# EAGLE board Schematic_grupo6 (EAGLE 9.6.2)
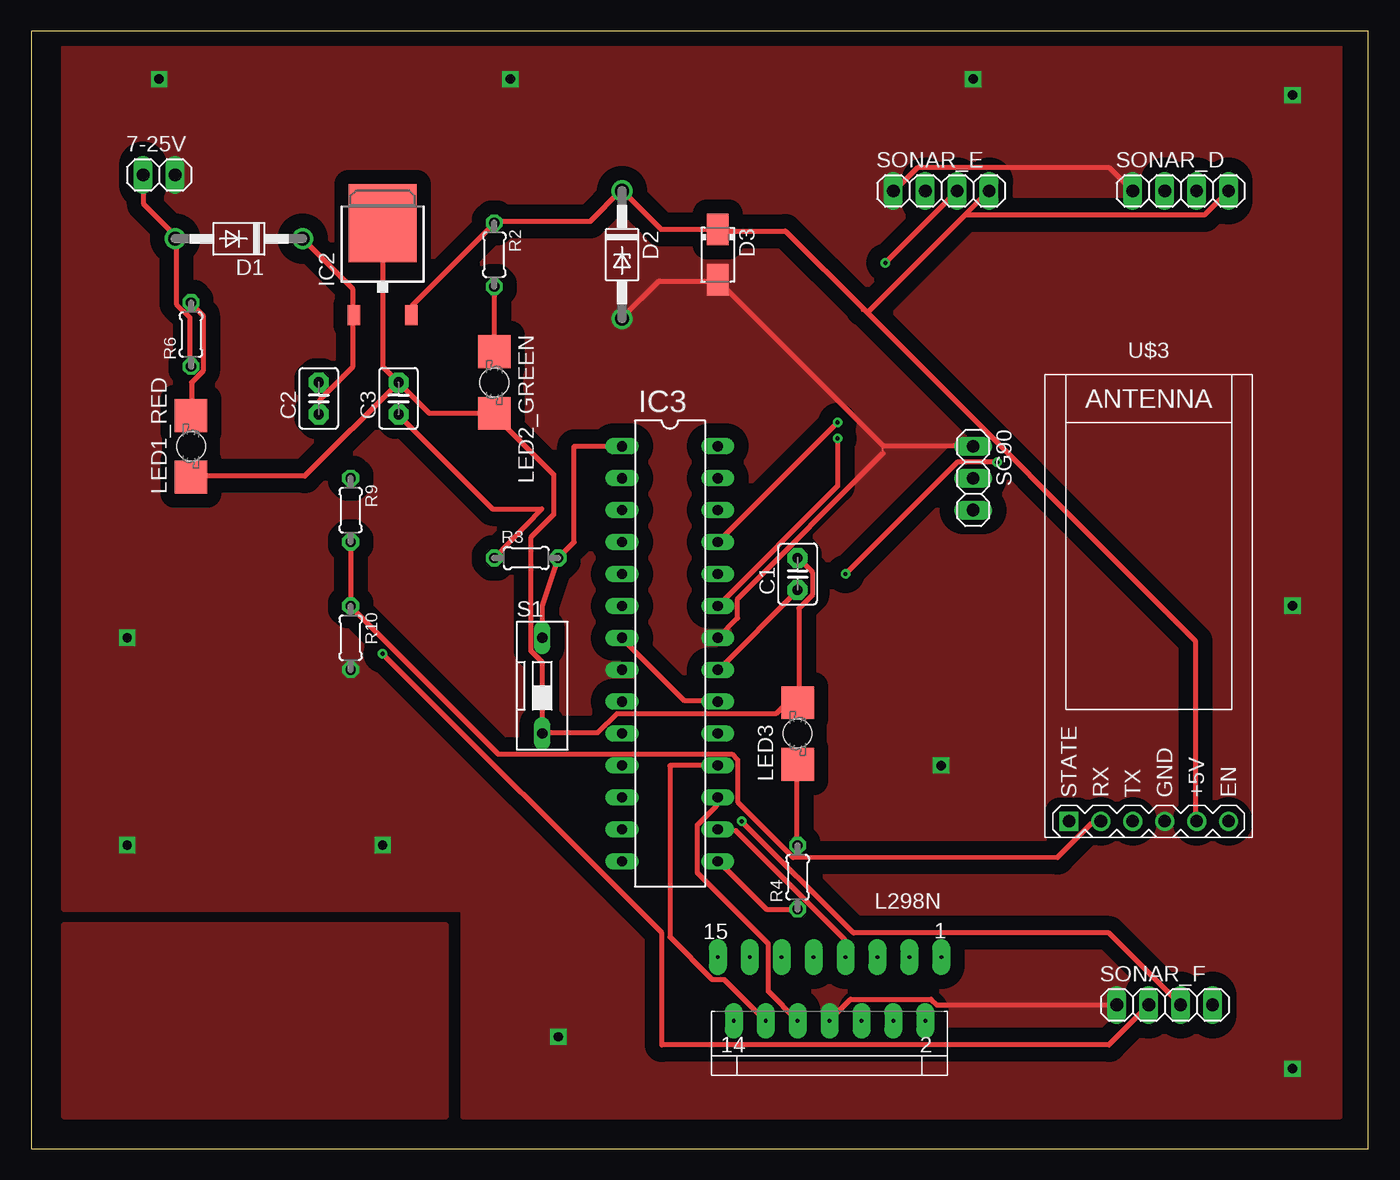
[diagram p0: board, top side]
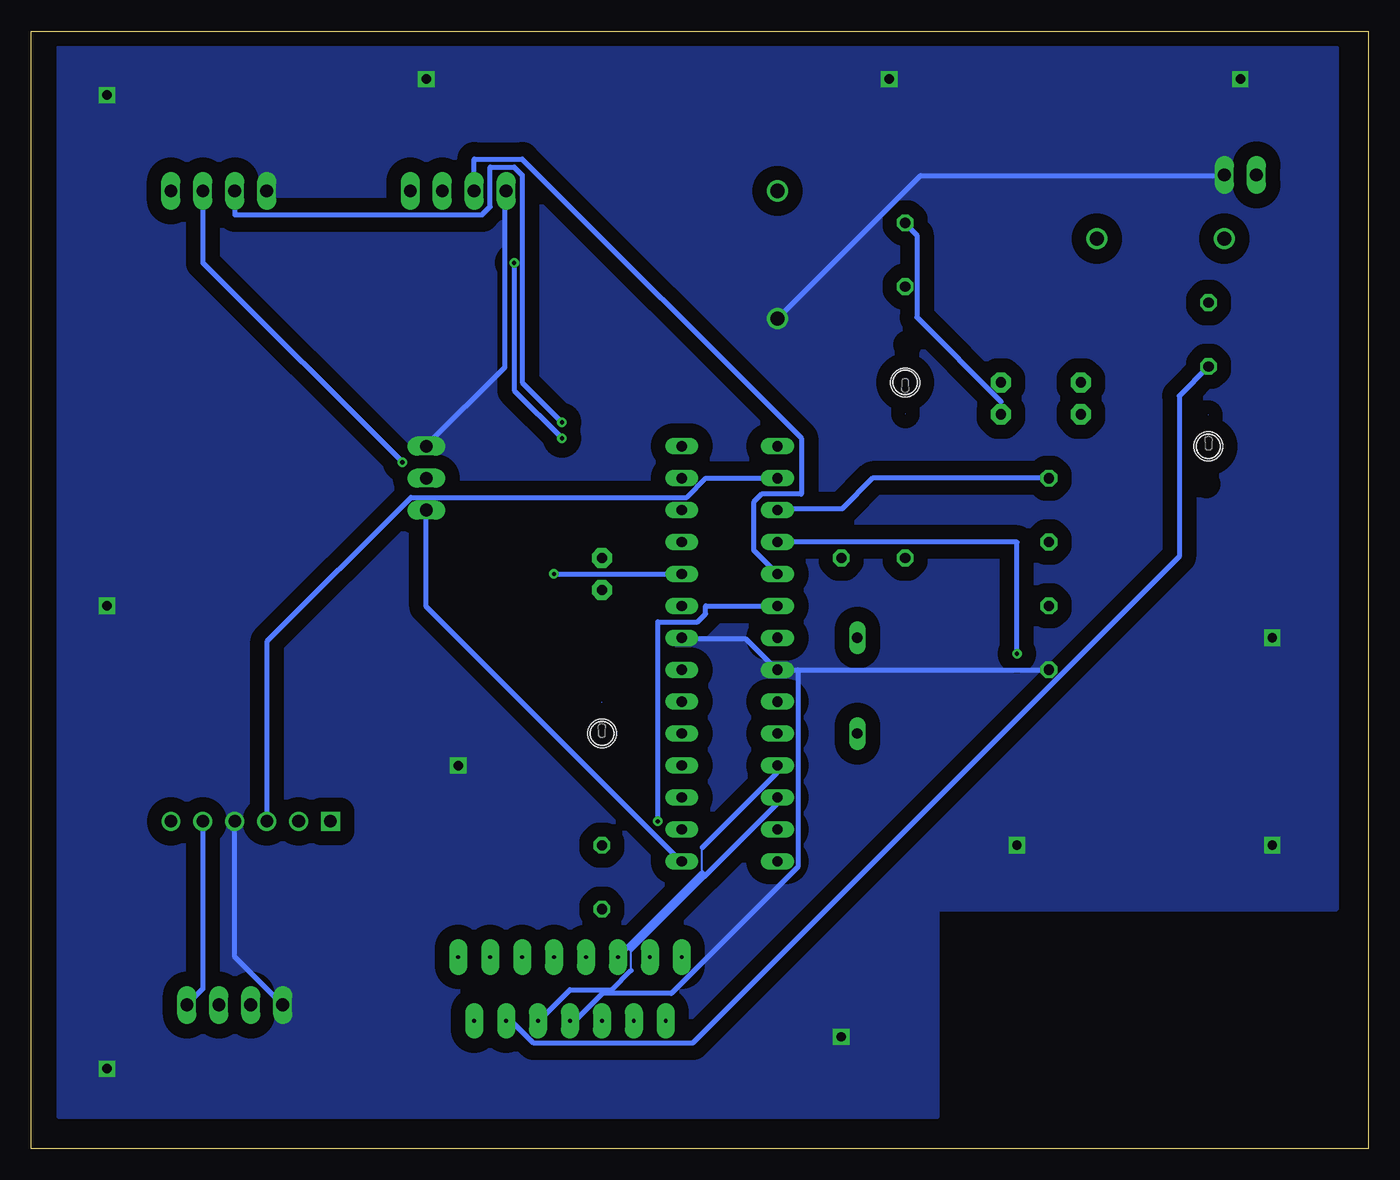
[diagram p1: board, bottom side, seen from below]

Size 106.35 x 88.89 mm. Coordinates in mm from the lower left corner, seen from the top.
Outline: 0,0 106.35,0 106.35,88.89 0,88.89 0,0
Copper layers (1*16): Top 0.035mm / dielectric 1.5mm / Bottom 0.035mm
Design rules "default": minimum track width 6mil, minimum drill 0.35mm, track to track 6mil, track to pad 6mil, pad to pad 6mil, via to via 6mil, smd to smd 6mil, copper to edge 40mil, drill to drill 6mil, minimum pad ring 10mil, minimum via ring 8mil, stop-mask expansion 4mil, vias tented up to drill 0mil, thermal gap 10mil

## Footprints (pad centres in the part's own frame; a part is rotated, then mirrored left to right if it is on the bottom)
1X02 = drill 1.016 long: 1 -1.27,0; 2 1.27,0
C2.5-3 = drill 0.813 pad 1.6 octagon: 1 -1.27,0; 2 1.27,0
DO41-10 = drill 1.118: A 5.08,0; C -5.08,0
DO41Z10 = drill 1.118: A 5.08,0; C -5.08,0
DO214AC = smd 2.5 x 1.7: A 2,0; C -2,0
TO252 = smd 1 x 1.6: 1 -2.28,-4.8; 2 2.28,-4.8 | smd 5.4 x 6.2: 3 0,2.5
DIL28-3 = drill 0.813 long: 1 -16.51,-3.81; 2 -13.97,-3.81; 3 -11.43,-3.81; 4 -8.89,-3.81; 5 -6.35,-3.81; 6 -3.81,-3.81; 7 -1.27,-3.81; 8 1.27,-3.81; 9 3.81,-3.81; 10 6.35,-3.81; 11 8.89,-3.81; 12 11.43,-3.81; 13 13.97,-3.81; 14 16.51,-3.81; 15 16.51,3.81; 16 13.97,3.81; 17 11.43,3.81; 18 8.89,3.81; 19 6.35,3.81; 20 3.81,3.81; 21 1.27,3.81; 22 -1.27,3.81; 23 -3.81,3.81; 24 -6.35,3.81; 25 -8.89,3.81; 26 -11.43,3.81; 27 -13.97,3.81; 28 -16.51,3.81
MW-15 = drill 0.305 pad 1.422 long: 1 -8.89,-7.62; 2 -7.62,-2.54; 3 -6.35,-7.62; 4 -5.08,-2.54; 5 -3.81,-7.62; 6 -2.54,-2.54; 7 -1.27,-7.62; 8 0,-2.54; 9 1.27,-7.62; 10 2.54,-2.54; 11 3.81,-7.62; 12 5.08,-2.54; 13 6.35,-7.62; 14 7.62,-2.54; 15 8.89,-7.62
P47F-BOTTOM = smd 2.6 x 2.6: A -2.45,0; C 2.45,0 | hole 2.3: 0,0
0204/5 = drill 0.813 octagon: 1 -2.54,0; 2 2.54,0
DS-01 = drill 0.813 long: 1 0,-3.81; 2 0,3.81
1X03 = drill 1.016 long: 1 -2.54,0; 2 0,0; 3 2.54,0
1X04 = drill 1.016 long: 1 -3.81,0; 2 -1.27,0; 3 1.27,0; 4 3.81,0
WIRELESS-BLUETOOTH-HC-05 = drill 1 square: 1 -6.35,-17.145 | drill 1: 2 -3.81,-17.145; 3 -1.27,-17.145; 4 1.27,-17.145; 5 3.81,-17.145; 6 6.35,-17.145

## Placement (x,y rotation side)
7-25V  [1X02]  10.16,77.47 0 top
C1  22pF  [C2.5-3]  60.96,45.72 90 top
C2  330nF  [C2.5-3]  22.86,59.69 90 top
C3  100nF  [C2.5-3]  29.21,59.69 90 top
D1  1N4007  [DO41-10]  16.51,72.39 180 top
D2  1N4728  [DO41Z10]  46.99,71.12 270 top
D3  SMAJ5.0A  [DO214AC]  54.61,71.12 270 top
IC2  LM 7805  [TO252]  27.94,71.12 0 top
IC3  ATMEGA328P  [DIL28-3]  50.8,39.37 270 top
L298N  [MW-15]  63.5,7.62 180 top
LED1_RED  LAP4-BOTTOM  [P47F-BOTTOM]  12.7,55.88 90 top
LED2_GREEN  LAP4-BOTTOM  [P47F-BOTTOM]  36.83,60.96 270 top
LED3  LAP4-BOTTOM  [P47F-BOTTOM]  60.96,33.02 90 top
R2  300  [0204/5]  36.83,71.12 270 top
R3  10k  [0204/5]  39.37,46.99 0 top
R4  300  [0204/5]  60.96,21.59 90 top
R6  2.2k  [0204/5]  12.7,64.77 90 top
R9  1k  [0204/5]  25.4,50.8 270 top
R10  2k  [0204/5]  25.4,40.64 270 top
S1  [DS-01]  40.64,36.83 0 top
SG90  [1X03]  74.93,53.34 270 top
SONAR_D  [1X04]  91.44,76.2 0 top
SONAR_E  [1X04]  72.39,76.2 0 top
SONAR_F  [1X04]  90.17,11.43 0 top
U$3  WIRELESS-BLUETOOTH-HC-05  [WIRELESS-BLUETOOTH-HC-05]  88.9,43.18 0 top

## Library data of the parts
7-25V SONAR_D SONAR_E SONAR_F = pinhead
C1-C3 = capacitor-wima
D1 D2 = diode
D3 = smaj_10; MF: Littelfuse; MPN: SMAJ5.0A; OC_FARNELL: 1827607; OC_NEWARK: 71J2029
IC2 = linear
IC3 = atmel; OC_FARNELL: unknown; OC_NEWARK: unknown
L298N = stepper_drivers_etc
LED1_RED LED2_GREEN LED3 = led
R2-R4 R6 R9 R10 = rcl; SPICEPREFIX: R
S1 = switch-dil; OC_FARNELL: unknown; OC_NEWARK: unknown
SG90 = pinhead; SPICEPREFIX: J
U$3 = diy-modules

## Nets
0: C1.2 C3.2 IC2.3 LED1_RED.A LED2_GREEN.C LED3.C S1.1
7-25V: 7-25V.1 D1.A L298N.4 R6.1
.: C3.1 D2.C D3.C IC2.2 R2.1 R3.1 SONAR_D.4 SONAR_E.4 SONAR_F.4 U$3.5
AREF: C1.1 IC3.21
AVCC: IC3.7 IC3.20
GND: 7-25V.2 D2.A D3.A IC3.8 IC3.22 L298N.8 R10.2 SG90.1 SONAR_D.1 SONAR_E.1 SONAR_F.1 U$3.4
N$1: LED3.A R4.2
N$3: LED1_RED.C R6.2
N$4: C2.1 D1.C IC2.1
N$5: LED2_GREEN.A R2.2
N$6: C2.2
PB0: IC3.14
PB1: IC3.15 R4.1 SG90.3
PB2: IC3.16 L298N.7
PB3: IC3.17 L298N.10
PB5: L298N.5
PB6: IC3.9
PB7: IC3.10
PC0: IC3.23 SONAR_E.3
PC1: IC3.24 SONAR_D.3
PC2: IC3.25 SONAR_D.2
PC3: IC3.26
PC4: IC3.27
PC5: IC3.28
PD0: IC3.2 U$3.3
PD1: IC3.3 R9.1
PD1': R9.2 R10.1 U$3.2
PD2: IC3.4 SONAR_F.2
PD3: IC3.5 SONAR_E.2
PD4: IC3.6 SONAR_F.3
PD5: IC3.11 L298N.11
PD6: IC3.12 L298N.6
PD7: IC3.13
RESET: IC3.1 R3.2 S1.2
S$1: IC3.18 L298N.12
VSS: L298N.9

## Tracks (layer width: path | path; a pad name or v marks a point on that pad's centre or on a via)
0
  Top 0.152: 61.06,35.51 LED3.C 60.91,35.36 60,35.36 | 61.06,46.94 C1.2 | 12.75,53.49 LED1_RED.A | 36.83,58.52 LED2_GREEN.C 36.83,58.37 | 27.99,73.61 IC2.3 | 40.64,33.07 S1.1
  Top 0.406: 61.06,35.51 61.06,42.98 62.13,44.04 62.13,45.87 61.06,46.94 | 60,35.36 59.23,34.59 46.58,34.59 45.06,33.07 40.64,33.07 40.64,38.71 39.73,39.62 39.73,48.62 41.55,50.44 41.55,53.65 36.83,58.37 | 12.75,53.49 21.74,53.49 C3.2 | 36.83,58.52 31.65,58.52 C3.2 | 27.99,73.61 27.99,62.18 C3.2
7-25V
  Top 0.152: 12.6,62.33 R6.1 | 11.53,72.39 D1.A 11.53,72.54 | 8.94,77.42 7-25V.1
  Top 0.406: 12.6,62.33 12.6,66.14 11.53,67.21 11.53,72.39 | 8.94,77.42 8.94,75.13 11.53,72.54
  Bottom 0.152: 68.07,10.06 68.53,10.06 L298N.4
  Bottom 0.406: 68.07,10.06 66.4,8.38 53.75,8.38 15.04,47.09 15.04,59.89 R6.1
.
  Top 0.152: 29.21,58.37 C3.1 | 30.28,67.06 30.28,66.45 IC2.2 | 36.83,73.61 R2.1 36.83,73.76 | 54.51,73.15 D3.C 54.66,73 | 47.04,76.2 D2.C 46.89,76.2 | 92.61,26.11 U$3.5 | 66.67,66.67 66.04,66.67 66.18,66.81
  Top 0.406: 29.21,58.37 36.68,50.9 40.59,50.9 R3.1 | 36.83,73.61 30.28,67.06 | 54.51,73.15 50.09,73.15 47.04,76.2 | 92.61,26.11 92.61,40.39 66.18,66.81 60,73 54.66,73 | 36.83,73.76 44.45,73.76 46.89,76.2 | 66.67,66.67 74.29,74.3 | 74.29,74.3 SONAR_E.4 | SONAR_D.4 93.34,74.3 74.29,74.3
  Bottom 0.152: 29.21,59.44 C3.1 | 36.83,73.61 R2.1
  Bottom 0.406: 29.21,59.44 35.92,66.14 35.92,72.69 36.83,73.61 | SONAR_F.4 92.71,12.7 U$3.5
AREF
  Top 0.152: 54.66,38.1 IC3.21 | 60.91,44.35 C1.1
  Top 0.406: 60.91,44.35 54.66,38.1
AVCC
  Top 0.152: 54.51,35.66 IC3.20 | 47.04,40.54 IC3.7
  Top 0.406: 54.51,35.66 51.92,35.66 47.04,40.54
GND  (via drill 0.75 pad 1.3)
  Top 0.152: 54.51,69.04 D3.A 54.66,69.04 | 47.04,66.14 D2.A | 74.93,55.93 SG90.1 | 67.77,55.32 67.77,55.93 | 68.68,76.2 SONAR_E.1 | 87.58,76.2 SONAR_D.1 | 63.5,10.21 L298N.8
  Top 0.406: 54.51,69.04 49.94,69.04 47.04,66.14 | 74.93,55.93 67.77,55.93 54.66,69.04 | 67.77,55.32 56.19,43.74 56.19,42.22 IC3.22 | 68.68,76.2 70.51,78.03 85.75,78.03 87.58,76.2 | SONAR_F.1 72.03,11.43 71.58,11.89 65.18,11.89 63.5,10.21
  Bottom 0.152: 54.51,40.54 IC3.22 | 47.04,38.1 IC3.8 | 63.04,10.21 63.5,10.21 L298N.8 | 11.53,77.42 7-25V.2 | 68.68,76.2 SONAR_E.1 | 74.93,55.93 SG90.1
  Bottom 0.406: IC3.8 45.36,38.1 | 45.36,38.1 R10.2 | 54.51,40.54 49.48,40.54 47.04,38.1 | 63.04,10.21 60.91,12.34 55.42,12.34 45.36,22.4 45.36,38.1 | 11.53,77.42 35.61,77.42 D2.A | U$3.4 90.17,15.24 SONAR_F.1 | 68.68,76.2 68.68,62.18 74.93,55.93
  other vias: 7.62,40.64 7.62,24.13 27.94,24.13 41.91,8.89 100.33,6.35 72.39,30.48 100.33,43.18 100.33,83.82 74.93,85.09 10.16,85.09 38.1,85.09
  pour Bottom (isolate 1.143, no thermals): 2.54,87.63 2.54,19.05 34.29,19.05 34.29,2.54 104.14,2.54 104.14,87.63
  pour Top (isolate 1.143, no thermals): 2.54,87.63 2.54,19.05 34.29,19.05 34.29,2.54 104.14,2.54 104.14,87.63
N$1
  Top 0.152: 60.91,30.48 LED3.A | 60.91,24.23 R4.2
  Top 0.406: 60.91,24.23 60.91,30.48
N$3
  Top 0.152: 12.75,58.37 LED1_RED.C | 12.75,67.21 R6.2
  Top 0.406: 12.75,58.37 12.75,60.96 13.66,61.87 13.66,66.29 12.75,67.21
N$4
  Top 0.152: 25.55,66.45 IC2.1 25.55,66.29 | 22.96,59.59 22.96,58.52 C2.1
  Top 0.406: 25.55,66.45 25.55,68.43 D1.C | 22.96,59.59 25.55,62.18 25.55,66.29
N$5
  Top 0.406: R2.2 LED2_GREEN.A
NAME
  pour Top: 2.54,17.78 2.54,2.54 33.02,2.54 33.02,17.78
PB1
  Top 0.152: 54.66,22.86 IC3.15
  Top 0.406: R4.1 58.47,19.05 54.66,22.86
  Bottom 0.152: 54.66,22.86 IC3.15
  Bottom 0.406: SG90.3 74.93,43.13 54.66,22.86
PB2
  Top 0.152: 56.03,25.3 54.66,25.3 IC3.16 | 64.72,16.61 64.72,15.24 L298N.7
  Top 0.406: 64.72,16.61 56.03,25.3
PB3
  Top 0.152: 54.51,27.28 54.51,27.89 IC3.17
  Top 0.406: 54.51,27.28 52.98,25.76 52.98,21.95 58.62,16.31 58.62,12.5 L298N.10
PC0  (via drill 0.35)
  Top 0.406: IC3.23 64.13,52.7 v64.13,56.52 | SONAR_E.3 v67.94,70.48
  Bottom 0.406: v64.13,56.52 67.94,60.33 v67.94,70.48
PC1  (via drill 0.35)
  Top 0.406: v64.77,45.72 73.66,54.61 v76.83,54.61
  Bottom 0.406: v64.77,45.72 IC3.24 | v76.83,54.61 92.71,70.48 SONAR_D.3
PC2  (via drill 0.35)
  Top 0.406: v64.13,57.78 IC3.25
  Bottom 0.406: v64.13,57.78 67.31,60.96 67.31,77.47 67.94,78.11 69.85,78.11 69.85,74.93 70.48,74.3 90.17,74.3 SONAR_D.2
PD0
  Bottom 0.152: 87.58,26.06 U$3.3
  Bottom 0.406: IC3.2 52.68,53.34 54.2,51.82 76.15,51.82 87.58,40.39 87.58,26.06
PD1
  Bottom 0.406: R9.1 39.42,53.34 41.86,50.9 46.89,50.9 IC3.3
PD1'
  Top 0.152: 84.38,25.91 84.99,25.91 | 25.4,43.13 R10.1
  Top 0.356: 60.6,23.16 81.64,23.16
  Top 0.406: R9.2 R10.1 | 81.64,23.16 84.38,25.91 | 60.6,23.16 56.19,27.58 56.19,30.94 55.73,31.39 37.13,31.39 25.4,43.13 | 84.99,25.91 U$3.2
PD2  (via drill 0.35)
  Top 0.406: v27.94,39.37 50.16,17.14 50.16,8.26 85.72,8.26 SONAR_F.2
  Bottom 0.406: IC3.4 27.94,48.26 v27.94,39.37
PD3
  Bottom 0.406: IC3.5 48.9,47.62 48.9,51.44 48.26,52.07 45.09,52.07 45.09,56.52 67.31,78.74 71.12,78.74 SONAR_E.2
PD4  (via drill 0.35)
  Top 0.406: v56.52,26.04 65.41,17.14 85.72,17.14 SONAR_F.3
  Bottom 0.406: IC3.6 52.7,43.18 52.7,42.55 53.34,41.91 56.52,41.91 v56.52,26.04
PD5
  Bottom 0.152: 52.98,21.95 52.98,23.93 | 47.04,30.48 IC3.11
  Bottom 0.406: 47.04,30.48 47.04,29.87 52.98,23.93 | L298N.11 52.98,21.95
PD6
  Bottom 0.152: 58.62,14.17 58.62,15.85 | 47.04,27.89 IC3.12 | 65.94,10.21 L298N.6
  Bottom 0.406: 47.04,27.89 47.04,27.43 58.62,15.85 | 58.62,14.17 60.15,12.65 63.5,12.65 65.94,10.21
RESET
  Top 0.406: S1.2 40.64,43.18 R3.2 43.18,48.26 43.18,55.88 IC3.1
S$1
  Top 0.152: 54.51,30.48 IC3.18
  Top 0.406: IC3.18 50.8,30.48 50.8,16.83 54.17,13.46 55.12,13.46 L298N.12

## Text on the board
Beschreib: LABSI - 2020/2021 / / Rodrigo Teixeira - 1160843 / André Oliveira - 1181045